# EAGLE board ATESLEME (EAGLE 9.6.2)
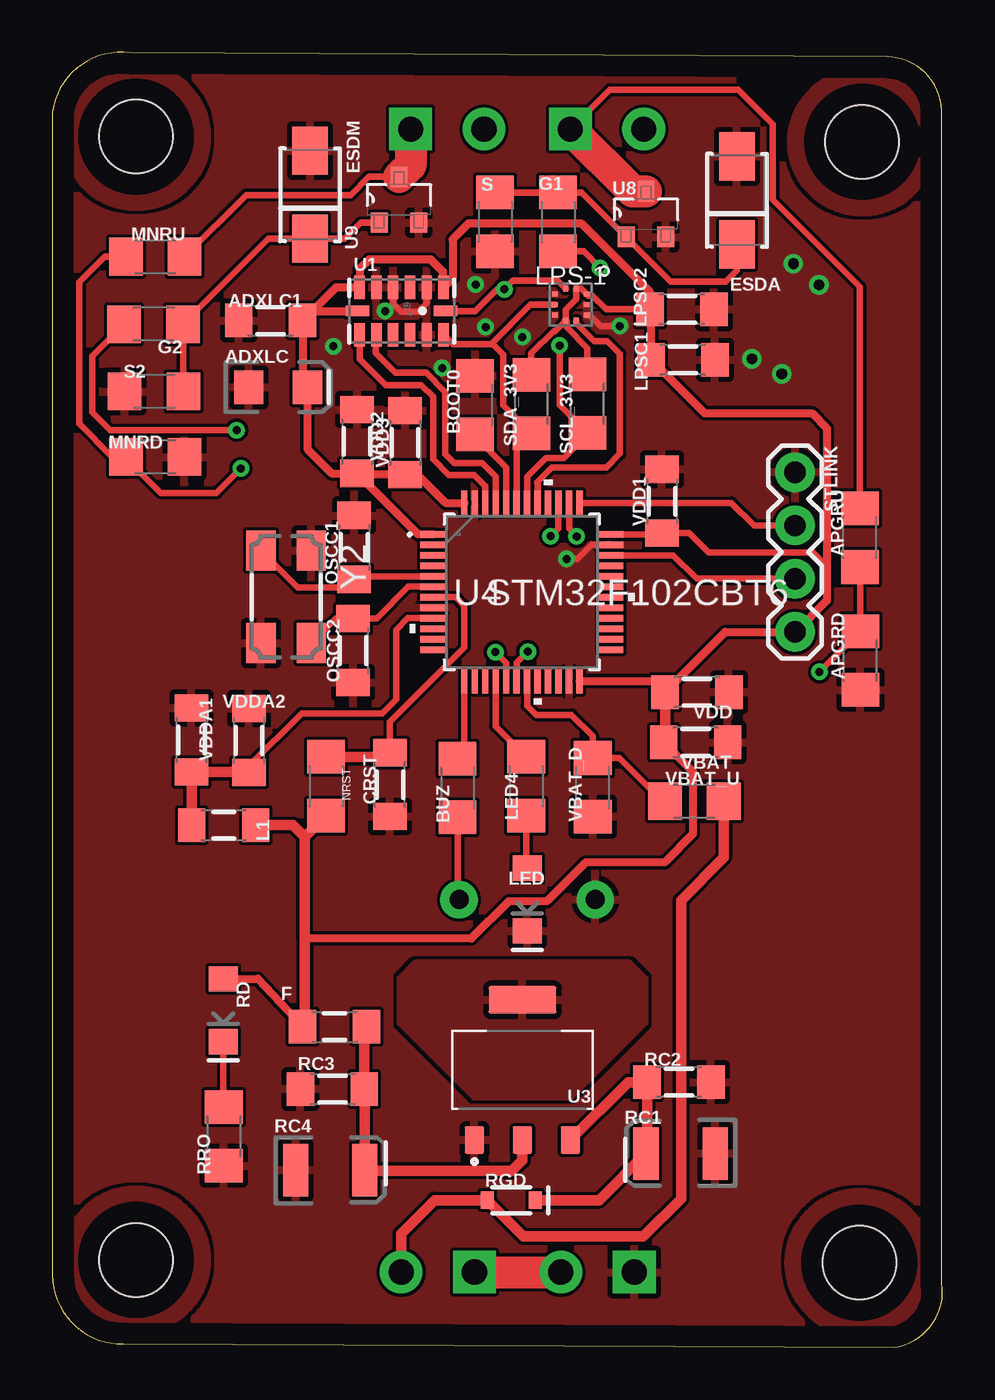
[diagram p0: board, top side]
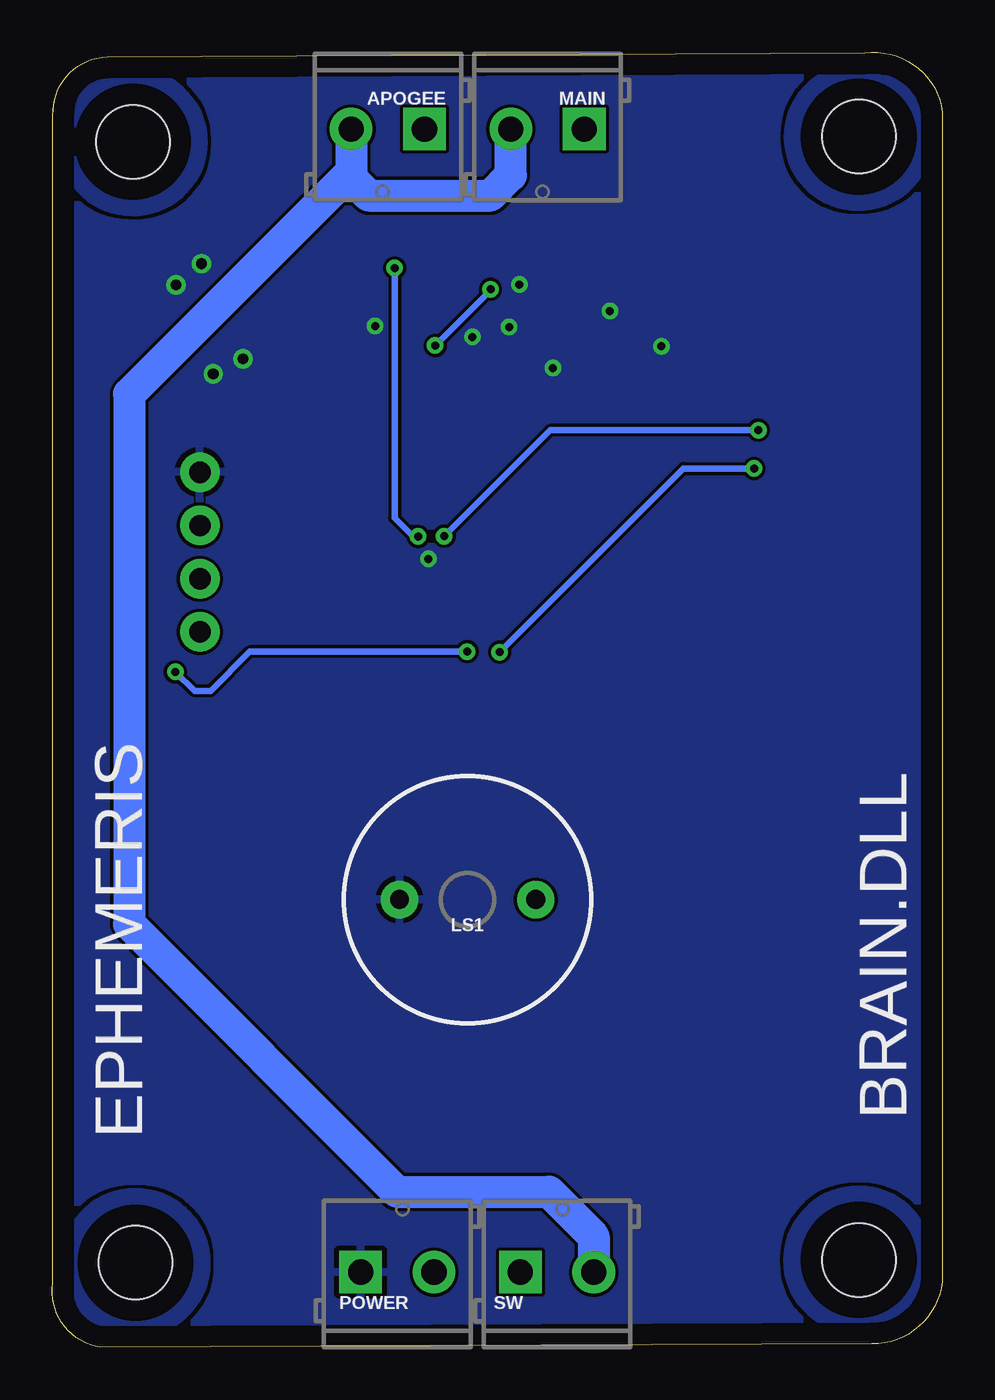
[diagram p1: board, bottom side, seen from below]

Size 42.47 x 61.8 mm. Coordinates in mm from the lower left corner, seen from the top.
Outline: 0,58.95 0,3.43 arc90 3.38,0.15 40.18,0 arc90 42.44,3.05 42.44,58.8 arc90 39.85,61.59 3.71,61.77 arc90 0,58.95
Copper layers (1*16): Top 0.035mm / dielectric 1.5mm / Bottom 0.035mm
Design rules "default": minimum track width 6mil, minimum drill 0.35mm, track to track 6mil, track to pad 6mil, pad to pad 6mil, via to via 6mil, smd to smd 6mil, copper to edge 40mil, drill to drill 6mil, minimum pad ring 10mil, minimum via ring 8mil, stop-mask expansion 4mil, vias tented up to drill 0mil, thermal gap 10mil
Holes 3.5 mm at 38.51,4.03 3.99,4.16 3.99,57.79 38.63,57.53

## Footprints (pad centres in the part's own frame; a part is rotated, then mirrored left to right if it is on the bottom)
EIA3216 = smd 1.4 x 1.6: + 1.4,0; - -1.4,0
RC-MASTER-SMD_C1206MP = smd 1.3 x 1.6: 1 -1.524,0; 2 1.524,0
1206 = smd 1.6 x 1.8: 1 -1.4,0; 2 1.4,0
SCREWTERMINAL-3.5MM-2-NS = drill 1.2 pad 2.032 square: 1 0,0 | drill 1.2 pad 2.032: 2 3.5,0
WE-TVSP_DO-214AC_UNIDIRECTIONAL = smd 2.3 x 1.7: 1 -2.1,0; 2 2.1,0
RC-MASTER-SMD_L1206MP = smd 1.3 x 1.6: 1 -1.524,0; 2 1.524,0
LED-1206 = smd 1.2 x 1.4: A -1.5,0; C 1.5,0
LPS22H = smd 0.25 x 0.275: 1 -0.25,-0.762; 2 0.25,-0.762; 6 0.25,0.762; 7 -0.25,0.762 | smd 0.275 x 0.25: 3 0.762,-0.5; 4 0.762,0; 5 0.762,0.5; 8 -0.762,0.5; 9 -0.762,0; 10 -0.762,-0.5
BUZZER-12MM = drill 0.9 pad 1.778: + 3.25,0; - -3.25,0
EIA3528 = smd 1.2 x 2.5: A 1.65,0; C -1.65,0
SOD-323 = smd 0.63 x 0.83: A 1.15,0; C -1.15,0
1X04 = drill 1.016 pad 1.88: 1 0,0; 2 2.54,0; 3 5.08,0; 4 7.62,0
LGA14_1:1_PATRICK = smd 0.5 x 1.124: 1 2,1.138; 2 1.2,1.138; 3 0.4,1.138; 4 -0.4,1.138; 5 -1.2,1.138; 6 -2,1.138; 8 -2,-1.13; 9 -1.2,-1.138; 10 -0.4,-1.138; 11 0.4,-1.138; 12 1.2,-1.138; 13 2,-1.138 | smd 1.124 x 0.5: 7 -2.1,0; 14 2.1,0
SOT229P700X180-4N = smd 0.93 x 1.31: 1 -2.29,-3.345; 2 0,-3.345; 3 2.29,-3.345 | smd 3.24 x 1.31: 4 0,3.345
LQFP48-7X7MM = smd 1.194 x 0.305: 1 -4.25,2.75; 2 -4.25,2.25; 3 -4.25,1.75; 4 -4.25,1.25; 5 -4.25,0.75; 6 -4.25,0.25; 7 -4.25,-0.25; 8 -4.25,-0.75; 9 -4.25,-1.25; 10 -4.25,-1.75; 11 -4.25,-2.25; 12 -4.25,-2.75; 25 4.25,-2.75; 26 4.25,-2.25; 27 4.25,-1.75; 28 4.25,-1.25; 29 4.25,-0.75; 30 4.25,-0.25; 31 4.25,0.25; 32 4.25,0.75; 33 4.25,1.25; 34 4.25,1.75; 35 4.25,2.25; 36 4.25,2.75 | smd 0.305 x 1.194: 13 -2.75,-4.25; 14 -2.25,-4.25; 15 -1.75,-4.25; 16 -1.25,-4.25; 17 -0.75,-4.25; 18 -0.25,-4.25; 19 0.25,-4.25; 20 0.75,-4.25; 21 1.25,-4.25; 22 1.75,-4.25; 23 2.25,-4.25; 24 2.75,-4.25; 37 2.75,4.25; 38 2.25,4.25; 39 1.75,4.25; 40 1.25,4.25; 41 0.75,4.25; 42 0.25,4.25; 43 -0.25,4.25; 44 -0.75,4.25; 45 -1.25,4.25; 46 -1.75,4.25; 47 -2.25,4.25; 48 -2.75,4.25
SOT95P240X112-3N = smd 0.972 x 0.802: D 1.092,0; G -1.092,0.94; S -1.092,-0.94
OSCCC500X320X110-4N = smd 1.9 x 1.4: 1 -2.2,-1.2; 2 2.2,-1.2; 3 2.2,1.2; 4 -2.2,1.2

## Placement (x,y rotation side)
ADXLC  10uF  [EIA3216]  10.77,45.82 0 top
ADXLC1  0.1uF  [RC-MASTER-SMD_C1206MP]  10.41,49 180 top
APGRD  3k3  [1206]  38.56,32.77 90 top
APGRU  10k  [1206]  38.53,38.63 90 top
APOGEE  [SCREWTERMINAL-3.5MM-2-NS]  24.71,58.14 180 bottom
BOOT0  10k  [1206]  20.17,44.97 270 top
BUZ  22  [1206]  19.33,26.7 270 top
CRST  100nF  [RC-MASTER-SMD_C1206MP]  16.1,26.85 270 top
ESDA  12V  [WE-TVSP_DO-214AC_UNIDIRECTIONAL]  32.66,54.74 90 top
ESDM  12V  [WE-TVSP_DO-214AC_UNIDIRECTIONAL]  12.3,55 90 top
F  0.75A  [RC-MASTER-SMD_L1206MP]  13.46,15.29 180 top
G1  20  [1206]  24.13,53.71 270 top
G2  20  [1206]  4.83,48.82 180 top
L1  [RC-MASTER-SMD_L1206MP]  8.18,24.92 180 top
LED  GREEN  [LED-1206]  22.66,21.36 270 top
LED4  1k  [1206]  22.61,26.77 270 top
LPS-1  LPS22  [LPS22H]  24.74,49.76 180 top
LPSC1  4.7uF  [RC-MASTER-SMD_C1206MP]  30.09,47.12 0 top
LPSC2  100nF  [RC-MASTER-SMD_C1206MP]  30.04,49.53 0 top
LS1  BUZZER-PTH  [BUZZER-12MM]  22.66,21.36 0 bottom
MAIN  [SCREWTERMINAL-3.5MM-2-NS]  17.09,58.14 180 bottom
MNRD  3k3  [1206]  4.9,42.49 180 top
MNRU  10k  [1206]  4.9,52.04 0 top
NRST  10k  [1206]  13.06,26.77 270 top
OSCC1  25pF  [RC-MASTER-SMD_C1206MP]  14.4,38.18 90 top
OSCC2  25pF  [RC-MASTER-SMD_C1206MP]  14.35,33.25 270 top
POWER  [SCREWTERMINAL-3.5MM-2-NS]  27.76,3.58 0 bottom
RC1  22uF  [EIA3528]  29.97,9.25 180 top
RC2  100nF  [RC-MASTER-SMD_C1206MP]  29.9,12.65 0 top
RC3  100nF  [RC-MASTER-SMD_C1206MP]  13.36,12.32 180 top
RC4  22uF  [EIA3528]  13.26,8.46 0 top
RD  Red  [LED-1206]  8.15,16.08 270 top
RGD  1A/23V  [SOD-323]  21.89,7.01 180 top
RRO  330  [1206]  8.18,10.06 270 top
S  3k3  [1206]  21.12,53.71 270 top
S2  3k3  [1206]  4.85,45.62 180 top
SCL_3V3  4k7  [1206]  25.53,45.03 90 top
SDA_3V3  4k7  [1206]  22.86,45.01 90 top
STLINK  [1X04]  35.43,41.76 270 top
SW  [SCREWTERMINAL-3.5MM-2-NS]  20.14,3.58 0 bottom
U1  ADXL345PATRICK  [LGA14_1:1_PATRICK]  16.66,49.45 0 top
U3  AMS1117-3.3  [SOT229P700X180-4N]  22.43,13.23 0 top
U4  STM32F102CBT6  [LQFP48-7X7MM]  22.4,36.04 0 top
U8  [SOT95P240X112-3N]  28.32,54.08 90 top
U9  [SOT95P240X112-3N]  16.54,54.76 90 top
VBAT  100nF  [RC-MASTER-SMD_C1206MP]  30.7,28.86 0 top
VBAT_D  3k3  [1206]  25.78,26.72 90 top
VBAT_U  10k  [1206]  30.63,26.06 0 top
VDD  4.7uF  [RC-MASTER-SMD_C1206MP]  30.75,31.26 0 top
VDD1  100nF  [RC-MASTER-SMD_C1206MP]  29.09,40.38 90 top
VDD2  100nF  [RC-MASTER-SMD_C1206MP]  14.54,43.23 90 top
VDD3  100nF  [RC-MASTER-SMD_C1206MP]  16.83,43.17 90 top
VDDA1  1uF  [RC-MASTER-SMD_C1206MP]  6.63,28.98 90 top
VDDA2  100nF  [RC-MASTER-SMD_C1206MP]  9.37,28.96 90 top
Y2  ABM2B-8.000MHZ-10-1-U-T  [OSCCC500X320X110-4N]  11.15,35.81 270 top

## Library data of the parts
ADXLC = SparkFun-Capacitors; PROD_ID: CAP-00811
ADXLC1 CRST F L1 LPSC1 LPSC2 OSCC1 OSCC2 RC2 RC3 VBAT VDD VDD1-VDD3 VDDA1 VDDA2 = 52101-101-REV-A_v16
APGRD APGRU BOOT0 BUZ G1 G2 LED4 MNRD MNRU NRST RRO S S2 SCL_3V3 SDA_3V3 VBAT_D VBAT_U = SparkFun-Resistors; PROD_ID: RES-08705; VALUE: 10
APOGEE MAIN POWER SW = SparkFun-Connectors; PROD_ID: CONN-08399
ESDA ESDM = Wurth_EMC Components_WE-TVSP; DATASHEET-URL: https://www.we-online.com/catalog/datasheet/824500102.pdf; IPEAK: 2.5A; MOUNT: SMT; PART-NUMBER: 824500102; PDISS: 400W; VBR: 117V; VCLAMP: 162V
LED RD = SparkFun-LED
LPS-1 = Arduino-Sensors; CODE-ARDUINO: A5390; DATASHEET: https://www.st.com/content/ccc/resource/technical/document/datasheet/bf/c1/4f/23/61/17/44/8a/DM00140895.pdf/files/DM00140895.pdf/jcr:content/translations/en.DM00140895.pdf; DISTRIBUTOR-LINK: https://www.digikey.com/product-detail/en/stmicroelectronics/LPS22HBTR/497-16265-1-ND/5799917; DISTRIBUTOR-PN: 497-16265-1-ND; MANUFACTURER: ST; MANUFACTURER-PN: LPS22HBTR
LS1 = SparkFun-Electromechanical; PROD_ID: COMP-08253; SF_SKU: COM-07950
RC1 RC4 = SparkFun-Capacitors; PROD_ID: CAP-08063
RGD = SparkFun-DiscreteSemi; PROD_ID: DIO-11623
STLINK = SparkFun-Connectors; PROD_ID: CONN-09696
U1 = Testing
U3 = AMS1117-3.3; AVAILABILITY: Unavailable; DESCRIPTION: Sot223/Pkg 1-Amp 3.3-Volt Low Drop Out Voltage Regulatator; MF: Advanced Monolithic Systems; MP: AMS1117-3.3; PACKAGE: SOT-89 ams; PRICE: None
U4 = STM32F102CBT6; BUILT_BY: EMA_UL_Team; COPYRIGHT: Copyright (C) 2018 Accelerated Designs. All rights reserved; MANUFACTURER_PART_NUMBER: STM32F102CBT6; SOURCELIBRARY: Updates_to_database_2020-10-19; VENDOR: STMicroelectronics
U8 U9 = IRLML6344TRPBF; AVAILABILITY: Good; DESCRIPTION: N-Channel 30V 5A (Ta) 1.3W (Ta) Surface Mount Micro3™/SOT-23; MF: Infineon Technologies; MP: IRLML6344TRPBF; PACKAGE: SOT-23 Multicomp; PRICE: None; PURCHASE-URL: https://pricing.snapeda.com/search/part/IRLML6344TRPBF/?ref=eda
Y2 = ABM3B-26.000MHZ-10-1-U-T; AVAILABILITY: Good; DESCRIPTION: 26MHz ±10ppm Crystal 10pF 50 Ohms 4-SMD, No Lead; MF: Abracon; MP: ABM3B-26.000MHZ-10-1-U-T; PACKAGE: SMD-4 Abracon LLC; PRICE: None; PURCHASE-URL: https://pricing.snapeda.com/search/part/ABM3B-26.000MHZ-10-1-U-T/?ref=eda

## Nets
3.3V: ADXLC1.1 ADXLC.+ F.2 L1.1 LPS-1.1 LPS-1.6 LPS-1.10 LPSC1.1 LPSC2.1 NRST.2 RD.A SCL_3V3.2 SDA_3V3.2 STLINK.4 U1.1 U1.6 U1.7 U4.1 U4.24 U4.36 U4.48 VBAT.1 VDD1.1 VDD2.1 VDD3.1 VDD.1
APG: G1.2 U4.38
BOOT0: BOOT0.2 U4.44
BUZZER: BUZ.1 U4.13
GND: ADXLC1.2 ADXLC.- APGRD.1 BOOT0.1 CRST.2 ESDA.2 ESDM.2 LED.C LPS-1.3 LPS-1.5 LPS-1.8 LPS-1.9 LPSC1.2 LPSC2.2 LS1.- MNRD.1 OSCC1.2 OSCC2.2 POWER.1 RC1.C RC2.2 RC3.2 RC4.C RRO.2 S2.2 S.2 STLINK.1 U1.2 U1.4 U1.5 U1.12 U3.1 U4.8 U4.23 U4.35 U4.47 U8.S U9.S VBAT.2 VBAT_D.1 VDD1.2 VDD2.2 VDD3.2 VDD.2 VDDA1.2 VDDA2.2 Y2.2 Y2.4
HT: U3.4
IN1: U1.8 U4.46
IN2: U1.9 U4.45
INT1: LPS-1.7 U4.41
LED: LED4.1 U4.16
MN: G2.2 U4.39
N$1: F.1 RC3.1 RC4.A U3.2
N$2: RD.C RRO.1
N$8: ESDM.1 G2.1 S2.1 U9.G
N$10: LED4.2 LED.A
N$13: BUZ.2 LS1.+
N$14: ESDA.1 G1.1 S.1 U8.G
NRST: CRST.1 NRST.1 U4.7
OSC_OUT: OSCC2.1 U4.6 Y2.3
OSC_ıN: OSCC1.1 U4.5 Y2.1
PC13: U4.2
SCL_3V3: LPS-1.2 SCL_3V3.1 U1.14 U4.42
SDA_3V3: LPS-1.4 SDA_3V3.1 U1.13 U4.43
SWCLK: STLINK.2 U4.37
SWDIO: STLINK.3 U4.34
VAPG: APGRU.2 APOGEE.1 U8.D
VAPGS: APGRD.2 APGRU.1 U4.18
VCC: POWER.2 SW.1
VDDA: L1.2 U4.9 VDDA1.1 VDDA2.1
VIN: APOGEE.2 MAIN.2 RGD.A SW.2 VBAT_U.2
VMN: MAIN.1 MNRU.2 U9.D
VMNS: MNRD.2 MNRU.1 U4.17
VNR: RC1.A RC2.1 RGD.C U3.3
VSENS: U4.19 VBAT_D.2 VBAT_U.1

## Tracks (layer width: path | path; a pad name or v marks a point on that pad's centre or on a via)
3.3V
  Top 0.305: U4.36 29.02,38.79 | 24.49,48.95 24.53,48.9 24.53,48.69 25.53,47.69 SCL_3V3.2 | SDA_3V3.2 22.86,47.44 23.92,48.5 23.99,48.5 LPS-1.6 24.49,49.51 24.99,50.01 LPS-1.1 25.24,50.52 LPS-1.10 25.57,50.19 25.77,50.19 26.42,49.53 LPSC2.1 | VDD1.1 30.39,38.85 31.32,37.92 36.3,37.92 36.96,37.27
  Top 0.381: U4.24 28.7,31.79 VDD.1 32.1,34.14 STLINK.4 35.47,34.14 36.96,35.63 36.96,37.27 36.96,43.87 36.25,44.58 31.12,44.58 LPSC1.1 28.57,49.48 LPSC2.1 28.52,50.35 25.23,53.65 19.86,53.65 19.09,52.88 19.09,51.02 U1.1 18.64,50.62 18.64,51.34 18.06,51.92 15.11,51.92 14.66,51.47 U1.6 13.53,50.59 ADXLC1.1 | RD.A 9.8,17.58 F.2 | VDD2.1 14.59,41.65 VDD3.1 17.41,41.65 18.76,40.29 U4.48 | U4.1 17.45,38.79 VDD2.1 | 29.02,38.79 VDD1.1 | ADXLC1.1 11.94,46.05 ADXLC.+ 12.17,42.87 13.34,41.7 VDD2.1 | ADXLC1.1 12.4,49.45 U1.7 | LPS-1.6 24.49,48.95 | VBAT.1 30.56,27.48 30.56,24.49 29.21,23.14 25.45,23.14 23.6,21.29 21.77,21.29 19.99,19.51 12.04,19.51
  Top 0.508: 12.04,19.51 12.04,24.35 | 12.04,24.35 NRST.2 | L1.1 11.47,24.92 12.04,24.35 | VDD.1 29.23,28.92 VBAT.1 | F.2 12.04,15.39 12.04,19.51
APG  (via drill 0.38)
  Top 0.305: G1.2 25.34,52.31 v26.14,51.51 | v25.02,38.7 24.65,39.06 U4.38
  Bottom 0.305: v26.14,51.51 26.14,39.57 25.26,38.7 v25.02,38.7
BOOT0
  Top 0.305: U4.44 21.65,41.97 20.17,43.46 BOOT0.2
BUZZER
  Top 0.305: U4.13 19.65,28.42 BUZ.1
D
  pour Top: 0.48,57.79 arc-90 3.99,61.29 arc-90 7.49,57.76 arc-90 4.01,54.28 arc-90
  pour Top: 35.13,57.53 arc-90 38.66,61.04 arc-90 42.14,57.51 arc-90 38.63,54.03 arc-90
  pour Top: 35,4.04 arc-90 38.53,7.54 arc-90 42.01,4.06 arc-90 38.48,0.53 arc-90
  pour Top: 0.48,4.17 arc-90 3.99,7.67 arc-90 7.49,4.17 arc-90 3.99,0.66 arc-90
  pour Bottom: 42.01,4.06 arc90 38.53,7.54 38.51,7.54 arc90 35,4.04 35,3.99 arc90 38.46,0.53 38.48,0.53 arc90
  pour Bottom: 7.53,4.16 arc90 3.99,7.67 arc90 0.51,4.14 arc90 4.04,0.66 arc90
  pour Bottom: 7.49,57.76 arc90 3.96,61.29 arc90 0.48,57.79 arc90 4.04,54.28 arc90
  pour Bottom: 42.14,57.56 arc90 38.66,61.04 arc90 35.13,57.51 arc90 38.68,54.03 arc90
GND  (via drill 0.38, 0.51)
  Top 0.305: U1.4 16.26,49.8 16.64,49.43 17.45,49.43 17.86,49.84 U1.2 | LPS-1.8 25.65,49.26 26.16,48.74 v27.08,48.74 | U4.35 25.73,38.3 25.04,37.62 v24.54,37.62
  other vias: 20.19,50.72 20.68,48.69 22.43,48.21 13.41,47.78 18.59,46.74 15.88,49.45 33.38,47.17 35.36,51.71 36.58,50.7 34.8,46.46
  pour Top (rank 2): -1.42,63.45 -1.42,-3.05 46,-3.05 46,63.45
  pour Bottom (rank 2): -2.69,64.97 -2.69,-4.83 47.52,-4.83 47.52,64.97
HT
  pour Top: 20.14,11.96 24.71,11.96 28.27,15.52 28.27,17.55 27.51,18.31 17.35,18.31 16.59,17.55 16.59,15.52
IN1
  Top 0.305: U4.46 20.65,41.1 20.12,41.63 18.91,41.63 18.16,42.38 18.16,45.37 17.61,45.92 15.9,45.92 14.66,47.16 U1.8
IN2
  Top 0.305: U4.45 21.15,41.55 20.51,42.19 19.18,42.19 18.75,42.62 18.75,45.59 17.83,46.51 16.36,46.51 15.42,47.45 15.42,48.27 U1.9
INT1
  Top 0.305: U4.41 23.15,41.26 23.14,41.28 23.14,41.3 23.83,41.99 26.42,41.99 27.08,42.65 27.08,47.42 26.48,48.02 25.85,48.02 24.99,48.87 LPS-1.7
LED
  Top 0.305: U4.16 21.15,29.62 LED4.1
MN  (via drill 0.38)
  Top 0.305: G2.2 1.91,47.3 1.91,44.63 2.77,43.76 v8.79,43.76 | U4.39 24.14,40.29 24.14,39.08 v23.77,38.71
  Bottom 0.305: v8.79,43.76 18.72,43.76 v23.77,38.71
N$1
  Top 0.508: U3.2 22.43,8.91 21.92,8.41 14.96,8.41 RC4.A 14.91,12.29 RC3.1 14.88,15.23 F.1
N$2
  Top 0.305: RD.C 8.15,11.48 RRO.1
N$8
  Top 0.305: S2.1 6.25,48.79 G2.1 10.31,52.9 ESDM.1 13.94,52.9 14.71,53.67 U9.G
N$10
  Top 0.305: LED4.2 22.61,22.91 LED.A
N$13
  Top 0.305: BUZ.2 19.33,21.44 LS1.+
N$14
  Top 0.305: S.1 G1.1 25.26,55.11 U8.G 29.51,50.85 32.13,50.85 32.66,51.38 ESDA.1
NRST
  Top 0.305: U4.7 19.25,35.79 19.66,35.38 19.66,33.4 16.1,29.85 CRST.1
  Top 0.508: NRST.1 15.9,28.17 CRST.1
OSC_OUT
  Top 0.305: U4.6 16.99,36.29 15.47,34.77 OSCC2.1 13.51,34.77 Y2.3
OSC_ıN
  Top 0.305: U4.5 14.54,36.79 OSCC1.1 14,36.25 11.72,36.25 Y2.1
SCL_3V3  (via drill 0.38)
  Top 0.305: U4.42 22.65,41.55 23.55,42.44 24.41,42.44 25.53,43.56 SCL_3V3.1 24.21,44.96 v24.21,47.8 | LPS-1.2 24.11,50.9 21.97,50.9 v21.56,50.5 21.23,50.5 20.18,49.45 U1.14
  Bottom 0.305: v24.21,47.8 21.56,50.44 v21.56,50.5
SDA_3V3
  Top 0.305: U4.43 22.15,42.9 SDA_3V3.1 21.51,44.96 21.51,47.37 21.01,47.88 20.93,47.88 | LPS-1.4 22.81,49.76 20.93,47.88 | 20.93,47.88 19.1,47.88 U1.13
SWCLK
  Top 0.305: U4.37 32.4,40.29 33.48,39.22 STLINK.2
SWDIO
  Top 0.305: U4.34 29.62,37.79 30.73,36.68 STLINK.3
VAPG
  Top 0.305: APOGEE.1 26.59,60.02 32.72,60.02 34.37,58.37 34.37,54.77 38.53,50.61 APGRU.2
  Top 1.524: APOGEE.1 27.69,55.17 U8.D
VAPGS  (via drill 0.38)
  Top 0.305: APGRD.2 38.56,34.19 | 38.56,34.19 38.56,37.21 APGRU.1 | U4.18 22.15,32.67 v22.68,33.2 | v36.6,32.23 38.56,34.19
  Bottom 0.305: v22.68,33.2 33.05,33.2 34.93,31.32 35.69,31.32 v36.6,32.23
VCC
  Top 1.524: SW.1 POWER.2
VDDA
  Top 0.305: VDDA2.1 9.37,27.74 11.89,30.25 15.75,30.25 16.41,30.91 16.41,34.24 16.96,34.79 U4.9
  Top 0.508: L1.2 6.65,27.43 VDDA1.1 9.35,27.46 VDDA2.1
VIN
  Top 0.508: SW.2 16.64,5.42 18.24,7.01 RGD.A 22.47,5.28 28.19,5.28 30,7.09 30,21.33 32.03,23.37 VBAT_U.2
  Bottom 1.524: MAIN.2 20.59,55.94 21.56,54.97 27.38,54.97 28.21,55.8 APOGEE.2 28.21,56.09 38.81,45.49 38.81,20.19 26.04,7.42 18.77,7.42 16.64,5.29 SW.2
VMN
  Top 0.305: MNRU.2 9.25,54.99 14.22,54.99 15.09,55.86 U9.D
  Top 1.524: MAIN.1 17.09,56.41 U9.D
VMNS  (via drill 0.38)
  Top 0.305: MNRU.1 2.49,52.05 1.27,50.83 1.27,44.09 2.87,42.49 MNRD.2 3.5,42.45 5.18,40.77 7.82,40.77 v8.99,41.94 | U4.17 21.65,32.65 v21.13,33.17
  Bottom 0.305: v21.13,33.17 12.37,41.94 v8.99,41.94
VNR
  Top 0.508: RGD.C 26.09,7.01 RC1.A 28.37,9.29 RC2.1 27.48,12.65 U3.3
VSENS
  Top 0.305: U4.19 22.65,30.61 23.09,30.18 24.77,30.18 25.78,29.16 VBAT_D.2 27.05,28.12 29.11,26.06 VBAT_U.1

## Text on the board
bPlace: BRAIN.DLL | EPHEMERIS